# EAGLE board LDR3 (EAGLE 8.2.2)
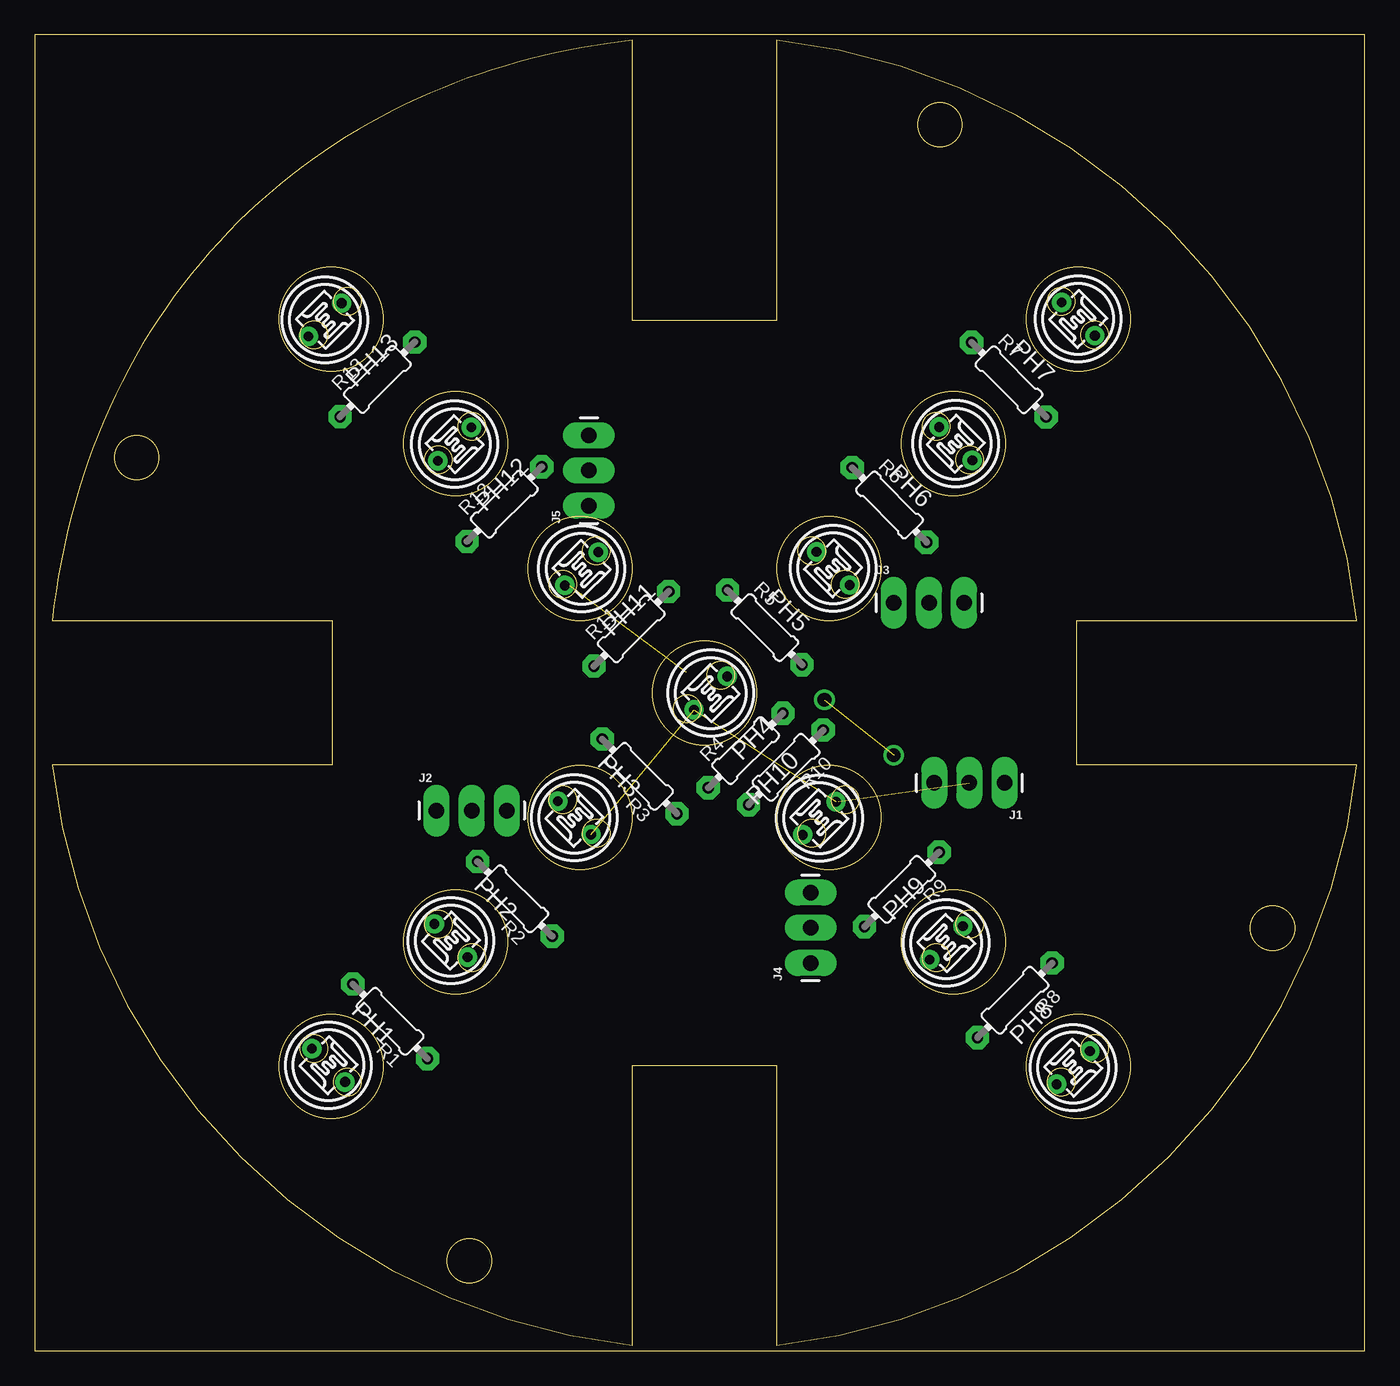
[diagram p0: board, top side]
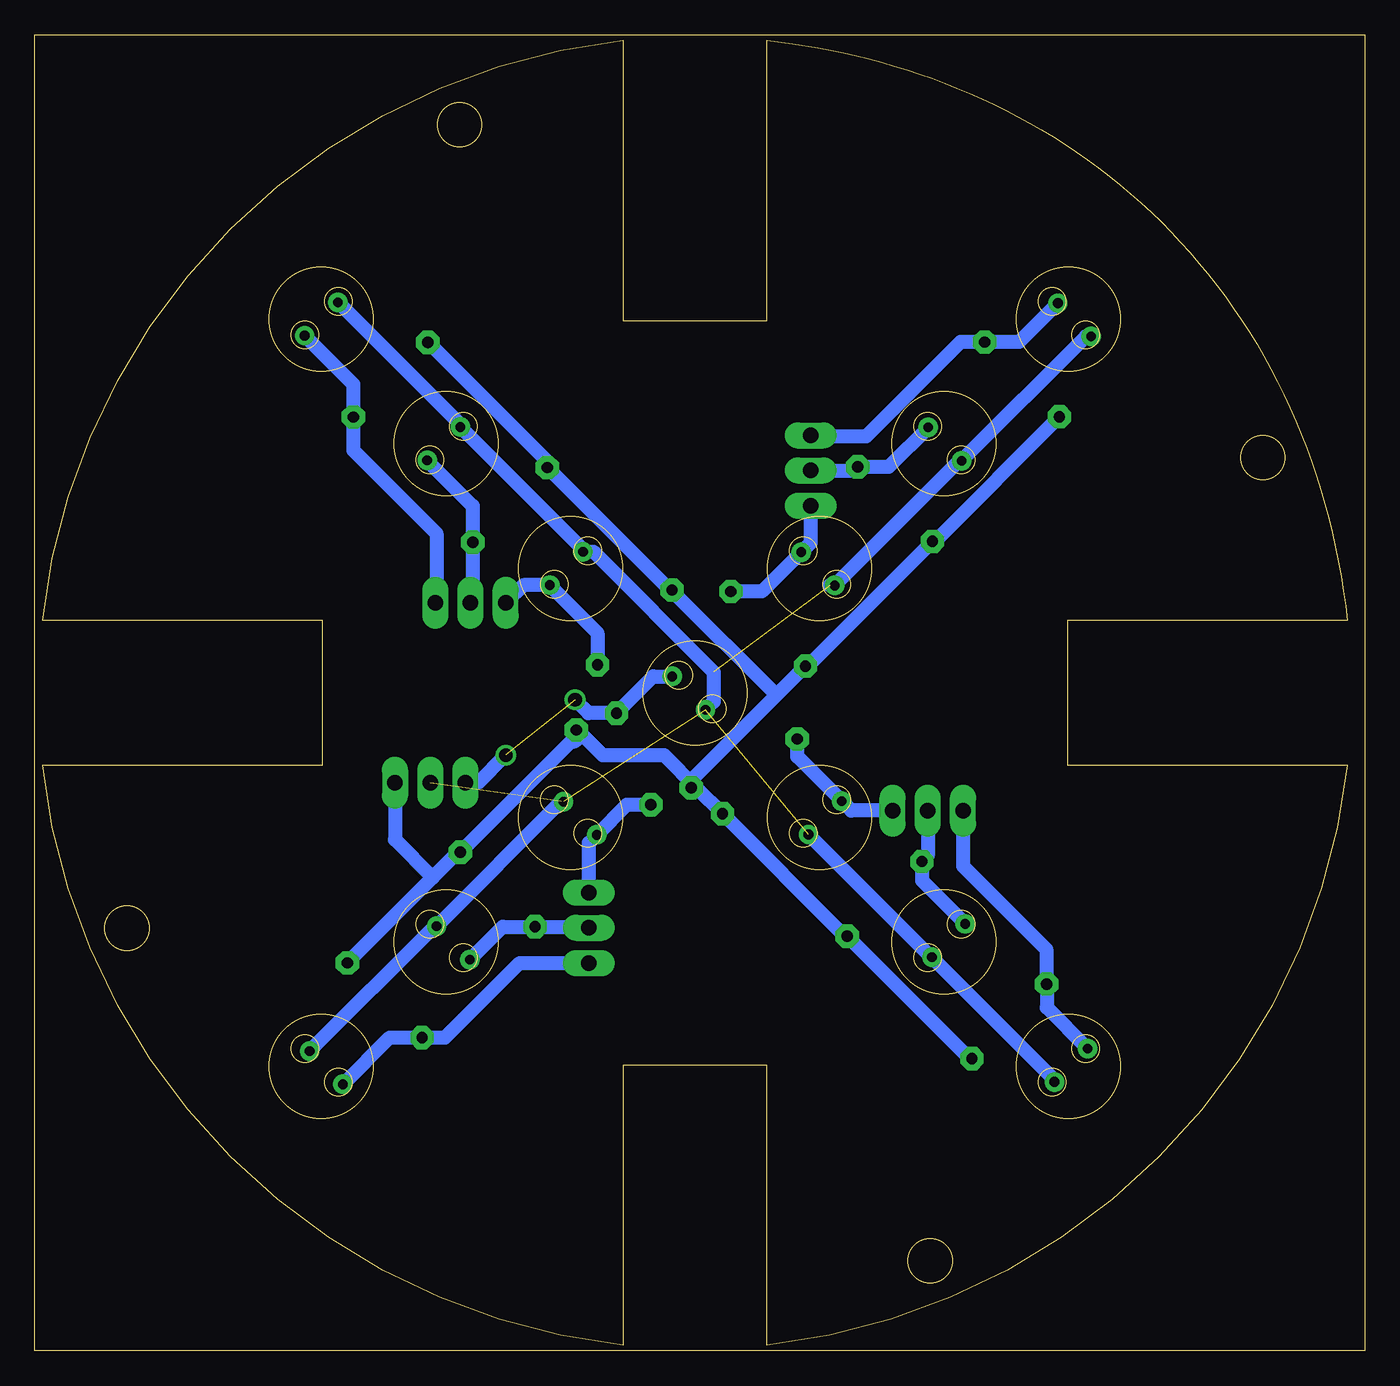
[diagram p1: board, bottom side, seen from below]

Size 96 x 95 mm. Coordinates in mm from the lower left corner, seen from the top.
Outline: 0,0 96,0 96,95 0,95 0,0
Outline: 53.55,74.37 43.15,74.37 43.15,94.58 41.31,94.35 39.46,94.05 38.54,93.87 37.62,93.68 36.7,93.47 35.78,93.25 34.86,93 33.95,92.74 33.03,92.46 32.13,92.16 31.22,91.84 30.32,91.5 29.42,91.15 28.53,90.78 27.65,90.38 26.77,89.97 25.9,89.54 25.04,89.09 24.18,88.62 23.33,88.13 22.49,87.62 21.66,87.09 20.84,86.55 20.03,85.98 19.23,85.4 18.45,84.79 17.67,84.17 16.91,83.53 16.16,82.87 15.43,82.19 14.7,81.49 14,80.77 13.3,80.04 12.63,79.29 11.97,78.52 11.32,77.73 10.69,76.93 10.08,76.11 9.49,75.28 8.91,74.43 8.36,73.56 7.82,72.68 7.29,71.79 6.79,70.88 6.31,69.96 5.85,69.02 5.41,68.07 4.99,67.11 4.58,66.14 4.2,65.16 3.84,64.16 3.5,63.16 3.19,62.15 2.89,61.13 2.61,60.1 2.35,59.06 2.12,58.01 1.91,56.96 1.71,55.9 1.54,54.84 1.39,53.77 1.27,52.7 21.48,52.7 21.48,42.3 1.27,42.3 arc77 43.15,0.42 43.15,20.63 53.55,20.63 53.55,0.42 arc77 95.43,42.3 75.22,42.3 75.22,52.7 95.43,52.7 arc77 53.55,94.58 53.55,74.37
Outline: circle at 20.14,73.32 radius 1
Outline: circle at 22.56,75.74 radius 1
Outline: circle at 31.55,66.75 radius 1
Outline: circle at 29.13,64.33 radius 1
Outline: circle at 40.54,57.76 radius 1
Outline: circle at 38.12,55.34 radius 1
Outline: circle at 49.52,48.78 radius 1
Outline: circle at 47.1,46.36 radius 1
Outline: circle at 58.51,39.79 radius 1
Outline: circle at 56.09,37.37 radius 1
Outline: circle at 67.49,30.8 radius 1
Outline: circle at 65.08,28.39 radius 1
Outline: circle at 76.48,21.82 radius 1
Outline: circle at 74.07,19.4 radius 1
Outline: circle at 20.14,21.82 radius 1
Outline: circle at 22.56,19.4 radius 1
Outline: circle at 31.55,28.39 radius 1
Outline: circle at 29.13,30.8 radius 1
Outline: circle at 40.54,37.37 radius 1
Outline: circle at 38.12,39.79 radius 1
Copper layers (1*16): Top 0.035mm / dielectric 1.5mm / Bottom 0.035mm
Design rules "default": minimum track width 6mil, minimum drill 0.35mm, track to track 6mil, track to pad 6mil, pad to pad 6mil, via to via 6mil, smd to smd 6mil, copper to edge 40mil, drill to drill 6mil, minimum pad ring 10mil, minimum via ring 8mil, stop-mask expansion 4mil, vias tented up to drill 0mil, thermal gap 10mil

## Footprints (pad centres in the part's own frame; a part is rotated, then mirrored left to right if it is on the bottom)
1X03_LONGPADS = drill 1.118 pad 1.88 long: 1 0,0; 2 2.54,0; 3 5.08,0
T0-46-A10XX = drill 0.7 pad 1.4: 1 -1.7,0; 2 1.7,0
0204/7 = drill 0.813 pad 1.676 octagon: 1 -3.81,0; 2 3.81,0

## Placement (x,y rotation side)
J1  [1X03_LONGPADS]  70,41 180 top
J2  [1X03_LONGPADS]  29,39 0 top
J3  [1X03_LONGPADS]  62,54 0 top
J4  [1X03_LONGPADS]  56,28 90 top
J5  [1X03_LONGPADS]  40,61 90 top
PH1  A1050_09  [T0-46-A10XX]  21.2,20.62 135 top
PH2  A1050_09  [T0-46-A10XX]  30.04,29.62 135 top
PH3  A1050_09  [T0-46-A10XX]  38.95,38.48 135 top
PH4  A1050_09  [T0-46-A10XX]  48.79,47.48 45 top
PH5  A1050_09  [T0-46-A10XX]  57.63,56.48 315 top
PH6  A1050_09  [T0-46-A10XX]  66.47,65.48 315 top
PH7  A1050_09  [T0-46-A10XX]  75.31,74.48 315 top
PH8  A1050_09  [T0-46-A10XX]  74.95,20.45 225 top
PH9  A1050_09  [T0-46-A10XX]  65.79,29.45 225 top
PH10  A1050_09  [T0-46-A10XX]  56.63,38.45 225 top
PH11  A1050_09  [T0-46-A10XX]  39.47,56.45 45 top
PH12  A1050_09  [T0-46-A10XX]  30.31,65.45 45 top
PH13  A1050_09  [T0-46-A10XX]  20.95,74.42 45 top
R1  [0204/7]  25.66,23.79 135 top
R2  [0204/7]  34.66,32.63 135 top
R3  [0204/7]  43.66,41.47 135 top
R4  [0204/7]  51.31,43.34 45 top
R5  [0204/7]  52.69,52.22 315 top
R6  [0204/7]  61.69,61.06 315 top
R7  [0204/7]  70.31,70.1 315 top
R8  [0204/7]  70.74,25.31 225 top
R9  [0204/7]  62.58,33.31 225 top
R10  [0204/7]  54.22,42.12 225 top
R11  [0204/7]  43.06,52.12 45 top
R12  [0204/7]  33.9,61.12 45 top
R13  [0204/7]  24.74,70.12 45 top

## Library data of the parts
J1-J5 = SparkFun-Connectors
PH1-PH13 = photo-elements
R1-R13 = adafruit

## Nets
5V: J1.1 R1.1 R2.1 R3.1 R4.1 R5.1 R6.1 R7.1 R8.1 R9.1 R10.1 R11.1 R12.1 R13.1
GND: J1.2 PH1.1 PH2.1 PH3.1 PH4.1 PH5.1 PH6.1 PH7.1 PH8.1 PH9.1 PH10.1 PH11.1 PH12.1 PH13.1
N$2: J2.1 PH1.2 R1.2
N$3: J2.2 PH2.2 R2.2
N$4: J2.3 PH3.2 R3.2
N$5: J1.3 PH4.2 R4.2
N$6: J3.1 PH5.2 R5.2
N$7: J3.2 PH6.2 R6.2
N$8: J3.3 PH7.2 R7.2
N$9: J4.1 PH8.2 R8.2
N$10: J4.2 PH9.2 R9.2
N$11: J4.3 PH10.2 R10.2
N$12: J5.1 PH11.2 R11.2
N$13: J5.2 PH12.2 R12.2
N$14: J5.3 PH13.2 R13.2

## Tracks (layer width: path | path; a pad name or v marks a point on that pad's centre or on a via)
5V
  Bottom 1.016: R1.1 28.51,21.1 R2.1 37.51,29.94 R3.1 48.22,40.65 | R13.1 31.05,58.43 R12.1 40.21,49.43 R11.1 42.46,47.33 | R7.1 59,64.17 R6.1 50.16,54.91 R5.1 50,54.86 42.46,47.33 | 67.26,34.17 R8.1 | 67.26,34.17 65.43,36 R9.1 57.28,44 57,44 56.91,44.09 R10.1 56.81,44.81 55,43 50.58,43 48.22,40.65 | 48.22,40.65 R4.1 48.62,41.18 42.46,47.33 | J1.1 70,36.91 67.26,34.17
GND  (4 unrouted)
  Bottom 1.016: PH1.1 22.4,19.58 PH2.1 31.29,28.42 PH3.1 | PH13.1 20.14,73.22 PH12.1 29.27,64.25 PH11.1 38.62,55.25 | PH7.1 65.27,66.84 PH6.1 56.43,57.84 PH5.1 55.68,57.68 47,49 47,46.87 PH4.1 | PH8.1 67.15,30.65 PH9.1 57.99,39.65 PH10.1
N$1  (via drill 1)
  other vias: 57,47
N$2
  Bottom 1.016: PH1.2 22.97,24.79 R1.2 23,26.52 23,29 29,35 J2.1
N$3
  Bottom 1.016: PH2.2 31.97,33.95 R2.2 31.54,35.75 J2.2
N$4
  Bottom 1.016: R3.2 40.97,42.9 PH3.2 37.07,39 J2.3
N$5  (1 unrouted)
  Bottom 1.016: PH4.2 51.36,48.68 R4.2 56.03,46.03 57,47 | J1.3 64,41 62,43
N$6
  Bottom 1.016: R5.2 55.38,51.83 PH5.2 60.72,55.28 J3.1
N$7
  Bottom 1.016: PH6.2 64.38,60.99 R6.2 64.38,54.16 J3.2
N$8
  Bottom 1.016: PH7.2 73,69.77 R7.2 73,65 67,59 67,54.08 J3.3
N$9
  Bottom 1.016: PH8.2 70.38,22.62 R8.2 66.38,22.62 61,28 J4.1
N$10
  Bottom 1.016: PH9.2 62.22,30.62 R9.2 56.08,30.62 J4.2
N$11
  Bottom 1.016: R10.2 53.25,39.43 PH10.2 56,36.68 J4.3
N$12
  Bottom 1.016: R11.2 43.51,54.81 PH11.2 40,58.32 J5.1
N$13
  Bottom 1.016: PH12.2 34.35,63.81 R12.2 36.87,63.54 J5.2
N$14
  Bottom 1.016: PH13.2 24.96,72.81 R13.2 29.19,72.81 36,66 39.92,66 J5.3
N$16  (via drill 1)
  other vias: 62,43